# EAGLE board TinkCad_Arduino (EAGLE 9.7.0)

Size 123.38 x 123.63 mm. Coordinates in mm from the lower left corner, seen from the top.
Outline: 0,0 123.38,0 123.38,123.63 0,123.63 0,0
Copper layers (1*16): Top 0.035mm / dielectric 1.5mm / Bottom 0.035mm
Design rules "default": minimum track width 6mil, minimum drill 0.35mm, track to track 6mil, track to pad 6mil, pad to pad 6mil, via to via 6mil, smd to smd 6mil, copper to edge 40mil, drill to drill 6mil, minimum pad ring 10mil, minimum via ring 8mil, stop-mask expansion 4mil, vias tented up to drill 0mil, thermal gap 10mil

## Footprints (pad centres in the part's own frame; a part is rotated, then mirrored left to right if it is on the bottom)
LEDRD254W60D565H860B = drill 0.981 pad 1.581: 1 -1.27,0; 2 1.27,0
LEDRD254W60D565H860B_B = drill 0.981 pad 1.581: 1 -1.27,0; 2 1.27,0
LEDRD254W60D565H860B_Y = drill 0.981 pad 1.581: 1 -1.27,0; 2 1.27,0
LEDRD254W60D565H860B_G = drill 0.981 pad 1.581: 1 -1.27,0; 2 1.27,0
LEDRD254W60D565H860B_W = drill 0.981 pad 1.581: 1 -1.27,0; 2 1.27,0
PIEZO = drill 1 pad 1.6: 1 -3.5,0; 2 3.5,0
RESAD1016W63L850D250B = drill 0.83 pad 1.43: 1 -5.08,0; 2 5.08,0
SWITCH-MOMENTARY-PTH-6.5MM = drill 1.016 pad 1.88: 1 -3.251,2.261; 2 3.251,2.261; 3 -3.251,-2.261; 4 3.251,-2.261
ARDUINO-UNO-R3-SHIELD = drill 1.016 pad 1.88: 3.3V 24.13,-2.54; 5V 24.13,0; A0 24.13,12.7; A1 24.13,15.24; A2 24.13,17.78; A3 24.13,20.32; A4 24.13,22.86; A5 24.13,25.4; AREF -24.13,-13.97; D2 -24.13,20.32; D3 -24.13,17.78; D4 -24.13,15.24; D5 -24.13,12.7; D6 -24.13,10.16; D7 -24.13,7.62; D8 -24.13,3.81; D9 -24.13,1.27; D10 -24.13,-1.27; D11 -24.13,-3.81; D12 -24.13,-6.35; D13 -24.13,-8.89; GND@0 24.13,2.54; GND@1 24.13,5.08; GND@2 -24.13,-11.43; IOREF 24.13,-7.62; NC 24.13,-10.16; RES 24.13,-5.08; RX -24.13,25.4; SCL -24.13,-19.05; SDA -24.13,-16.51; TX -24.13,22.86; VIN 24.13,7.62

## Placement (x,y rotation side)
D2  RED  [LEDRD254W60D565H860B]  22.84,7.91 0 top
D5  BLUE  [LEDRD254W60D565H860B_B]  30.46,7.91 0 top
D6  YELLOW  [LEDRD254W60D565H860B_Y]  38.08,7.91 0 top
D7  BLUE  [LEDRD254W60D565H860B_B]  45.7,7.91 0 top
D8  GREEN  [LEDRD254W60D565H860B_G]  53.32,7.91 0 top
D9  WHITE  [LEDRD254W60D565H860B_W]  60.94,7.91 0 top
PIEZO1  PIEZO  [PIEZO]  76.18,33.31 0 top
R2  1k  [RESAD1016W63L850D250B]  21.57,20.61 90 top
R4  1k  [RESAD1016W63L850D250B]  29.19,20.61 90 top
R5  1k  [RESAD1016W63L850D250B]  6.33,38.39 90 top
R6  1k  [RESAD1016W63L850D250B]  36.81,20.61 90 top
R7  1k  [RESAD1016W63L850D250B]  44.43,20.61 90 top
R11  1k  [RESAD1016W63L850D250B]  52.05,20.61 90 top
R12  1k  [RESAD1016W63L850D250B]  59.67,20.61 90 top
S1  SWITCH_MOMENTARY  [SWITCH-MOMENTARY-PTH-6.5MM]  8.87,21.88 90 top
U3  ARDUINO-UNO-R3-SHIELD  [ARDUINO-UNO-R3-SHIELD]  88.86,93.78 270 top

## Library data of the parts
D2 = Tinkercad; CATEGORY: Opto-Electronic; SUB-CATEGORY: LED; VALUE: LED_RED
D5 D7 = Tinkercad; CATEGORY: Opto-Electronic; SUB-CATEGORY: LED; VALUE: LED_BLUE
D6 = Tinkercad; CATEGORY: Opto-Electronic; SUB-CATEGORY: LED; VALUE: LED_YELLOW
D8 = Tinkercad; CATEGORY: Opto-Electronic; SUB-CATEGORY: LED; VALUE: LED_GREEN
D9 = Tinkercad; CATEGORY: Opto-Electronic; SUB-CATEGORY: LED; VALUE: LED_WHITE
PIEZO1 R2 R4-R7 R11 R12 S1 U3 = Tinkercad

## Nets
D2_A: D2.1 R2.1
D5_A: D5.1 R4.1
D6_A: D6.1 R6.1
D7_A: D7.1 R7.1
D8_A: D8.1 R11.1
D9_A: D9.1 R12.1
U3_5V: R5.2 U3.5V
U3_D2: R5.1 S1.1 S1.2 U3.D2
U3_D3: R4.2 U3.D3
U3_D4: R2.2 U3.D4
U3_D5: R6.2 U3.D5
U3_D6: R7.2 U3.D6
U3_D7: R11.2 U3.D7
U3_D8: R12.2 U3.D8
U3_D9: PIEZO1.1 U3.D9
U3_GND: D2.2 D5.2 D6.2 D7.2 D8.2 D9.2 PIEZO1.2 S1.3 S1.4 U3.GND@0 U3.GND@1 U3.GND@2

## Tracks (layer width: path | path; a pad name or v marks a point on that pad's centre or on a via)
D2_A  (1 unrouted)
D5_A  (1 unrouted)
D6_A  (1 unrouted)
D7_A  (1 unrouted)
D8_A  (1 unrouted)
D9_A  (1 unrouted)
U3_5V  (1 unrouted)
U3_D2  (3 unrouted)
U3_D3  (1 unrouted)
U3_D4  (1 unrouted)
U3_D5  (1 unrouted)
U3_D6  (1 unrouted)
U3_D7  (1 unrouted)
U3_D8  (1 unrouted)
U3_D9  (1 unrouted)
U3_GND  (11 unrouted)